# Altium PCB PCB1.PcbDoc
Units mil, origin at the board's own origin, x right, y up, seen from the top; angles counter-clockwise.
Board outline 6000 x 4000 mil, 2 copper layers (Top Layer, Bottom Layer); 10 components, 18 nets, 46 pads, 2 vias.
Unrouted connection lines stored in the file: 6.
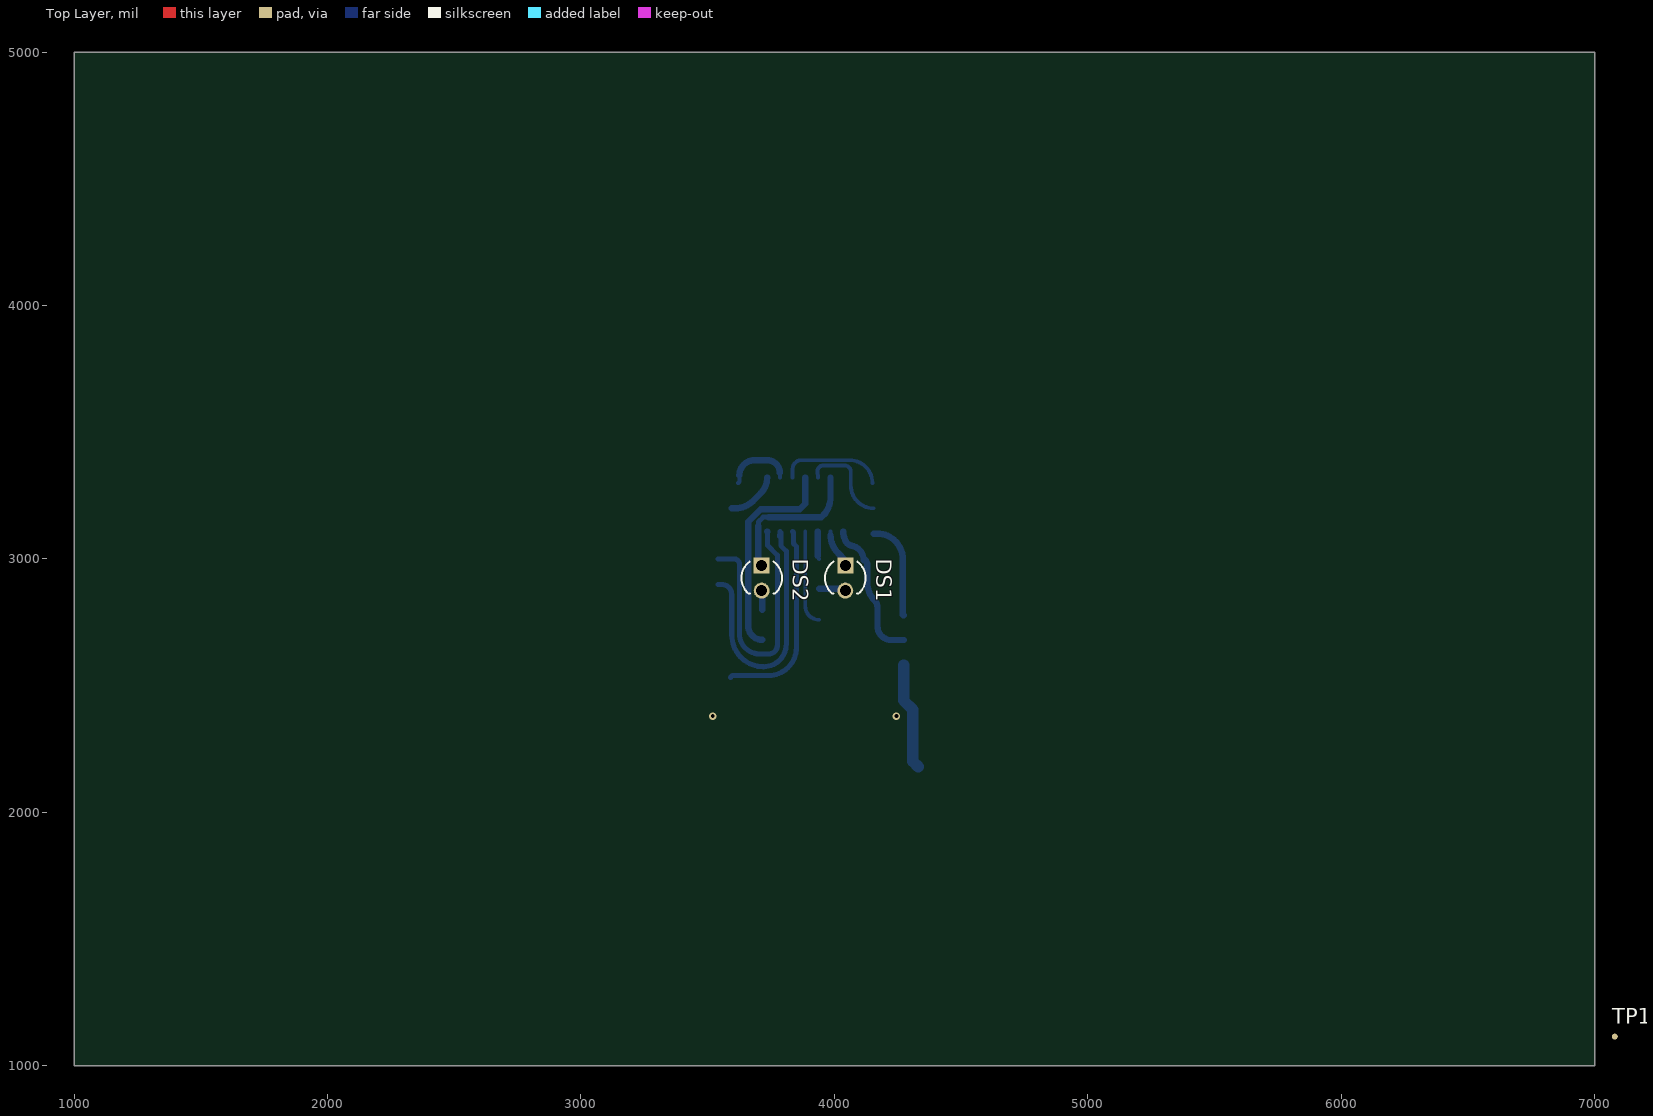
[diagram p0: Top Layer view]
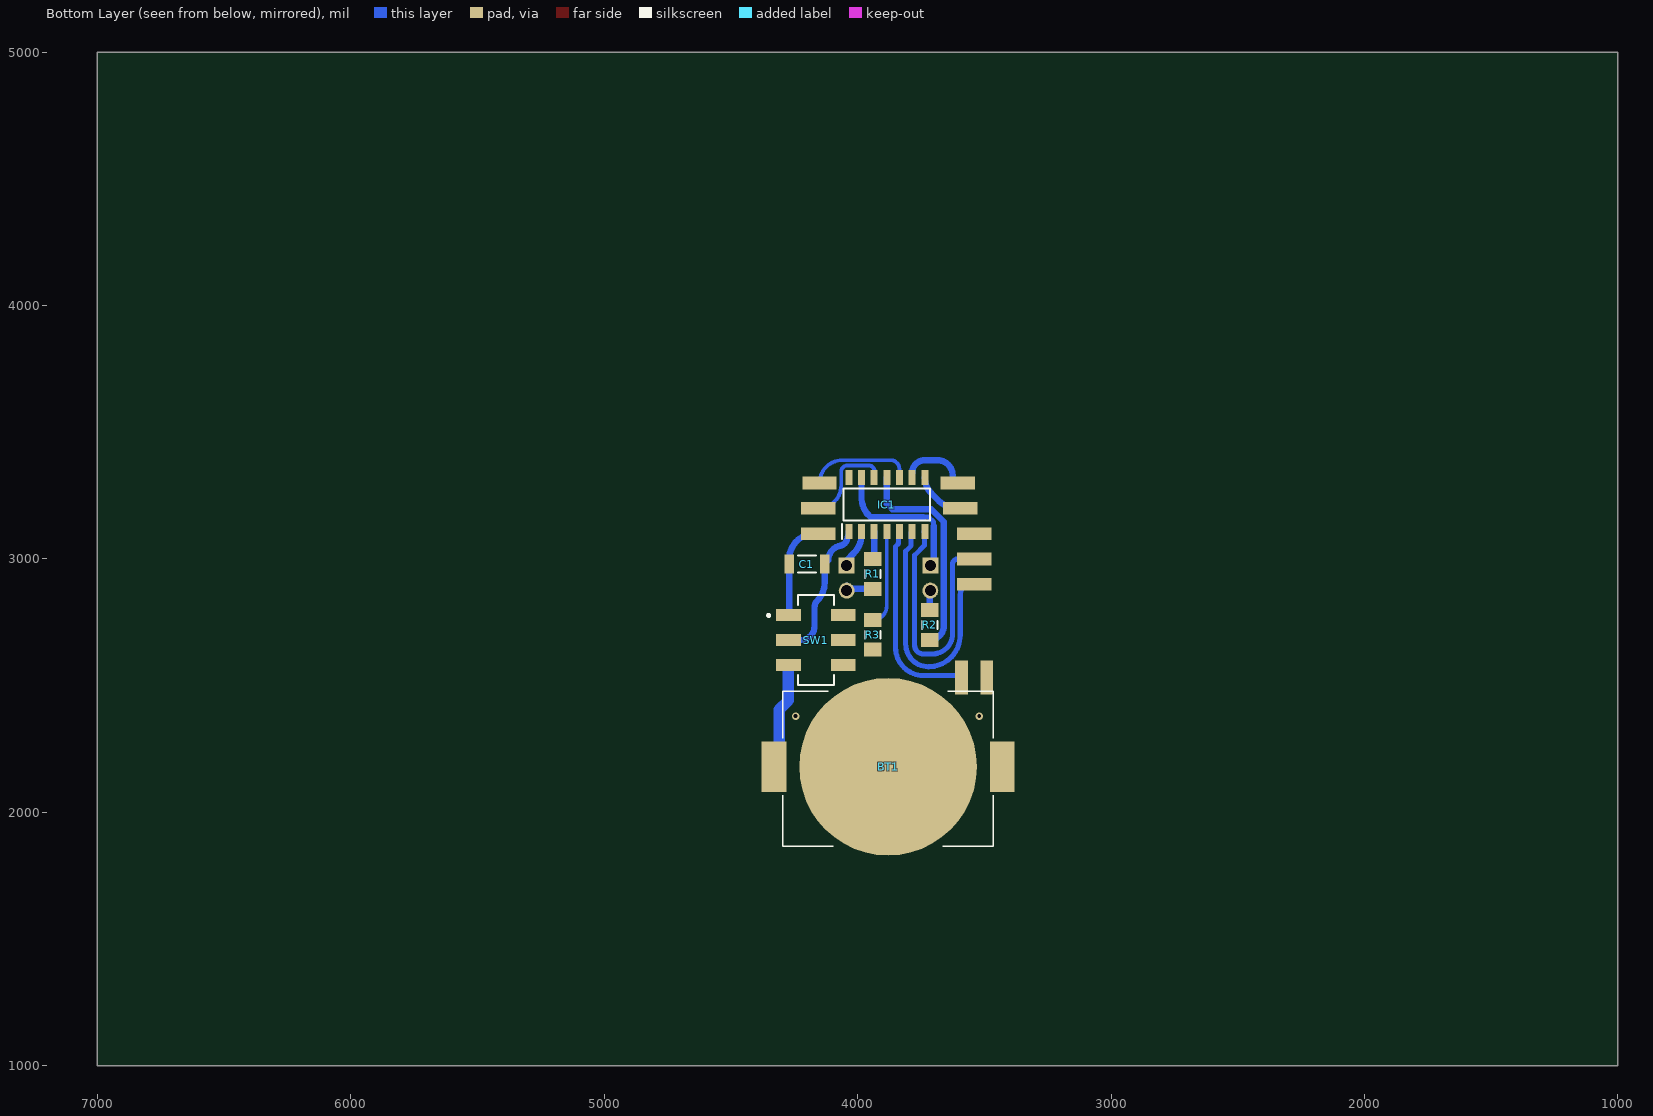
[diagram p1: Bottom Layer view, seen from below]
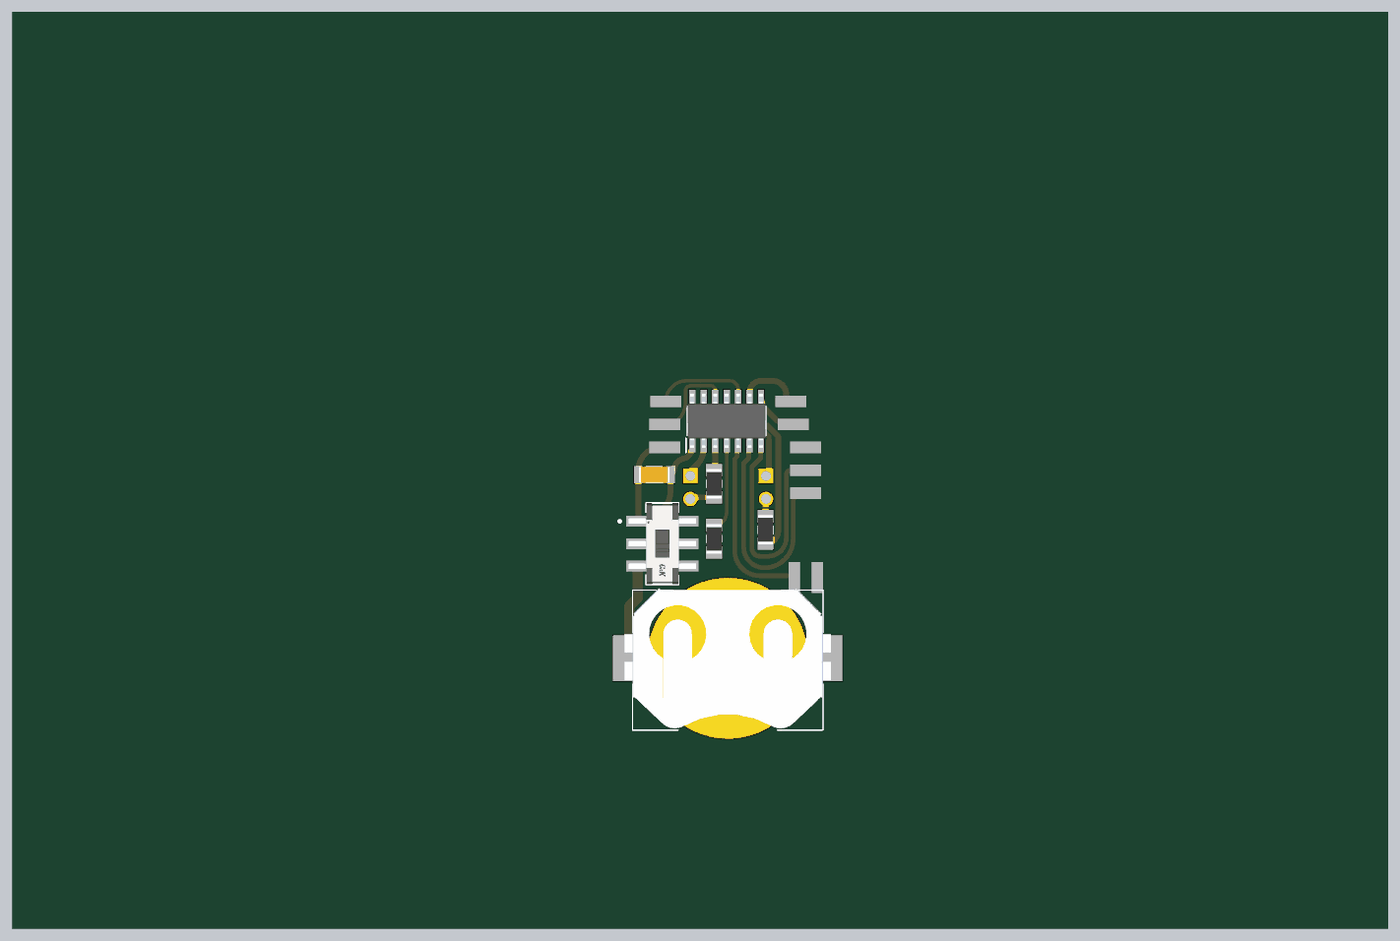
[diagram p2: 3D render of the assembled board from below, using the file's embedded part models]

## Layer stack, top to bottom
Top Solder: solder mask 0.4, Solder Resist, Dk 3.5
Top Layer: signal copper 1.4
Dielectric 1: dielectric 12.6, FR-4, Dk 4.8
Bottom Layer: signal copper 1.4
Bottom Solder: solder mask 0.4, Solder Resist, Dk 3.5

## Board outline
1000,1000 7000,1000 7000,5000 1000,5000

## Design rules (kind name [scope] priority, off if disabled: settings)
Clearance [All] p1: gap=10 ignorepadtopadclearanceinfootprint=FALSE except(0: Arc-Hole Track-Hole SMDPad-Hole THPad-Hole Via-Hole Fill-Hole Poly-Hole Region-Hole Text-Hole)
PolygonConnect [All] p1: connectstyle=Relief reliefconductorwidth=10 reliefentries=4 polygonreliefangle="90 Angle" airgapwidth=10
RoutingVias [All] p1: holewidth=28 width=50 viastyle="Through Hole" minholewidth=28 minwidth=50 maxholewidth=28 maxwidth=50
SolderMaskExpansion [All] p1: expansion=4 istentingtop=FALSE
Width [All] p1: maxlimit=10 minlimit=10 preferedwidth=10
30 further rules are at their usual default settings.

## Components (designator, comment, footprint, x,y, rotation, side; value= is the part's Value field where it differs from the comment)
BT1 "BAT-HLD-001" BAT_BAT-HLD-001 3880,2180 r180 bottom
C1 "Capacitor 1 uF +/- 10% 25 V 1206" CAPC3216X180X20ML20 4200,2980 r180 bottom value=1µF
DS1 "HLMP-1790" LED-2P-2.54-3MM_V 4043.15,2925 r270 top
DS2 "HLMP-1790" LED-2P-2.54-3MM_V 3713.15,2925 r270 top
IC1 "ATTINY404-SSN" SOIC127P600X175-14N 3885,3215 r90 bottom
R1 "Resistor 1k +/-1% 1206 250 mW" RESC3116X70X50ML13T20 3940,2940.94 r270 bottom value=0R-15R
R2 "Resistor 1k +/-1% 1206 250 mW" RESC3116X70X50ML13T20 3715,2740 r90 bottom value=0R-15R
R3 "Resistor 1k +/-1% 1206 250 mW" RESC3116X70X50ML13T20 3940,2700.94 r270 bottom value=30-70R
SW1 "JS202011SCQN" FP-JS202011SCQN-MFG 4165,2680 r270 bottom
TP1 "TPAD6R" TP06R 7080,1115 r90 top

## Footprints (in the part's own frame and the unit in brackets; to place one, negate y for a bottom-side part, rotate by r counter-clockwise, add the part's x,y. Pads: shape width x height; smd on the part's side, far side on the other; paste and mask are expansions set on the pad)
BAT_BAT-HLD-001 [mm]
  round 17.8 smd paste-10: N1(0,0)
  rect 2.5x5.1 smd: P1(-11.45,0) P2(11.45,0)
  silkscreen extent -10.55,-7.95 10.55,7.55, body extent -11.43,-7.75 11.43,7.75, height 4.32
CAPC3216X180X20ML20 [mm] "Chip Capacitor, 2-Leads, Body 3.40x1.80mm, IPC Low Density"
  rect 0.95x1.9 smd: 1(-1.775,0) 2(1.775,0)
  silkscreen extent -0.9,-0.85 0.9,0.85, body extent -1.7,-0.9 1.7,0.9, height 1.8
FP-JS202011SCQN-MFG [mm]
  rect 1.2x2.5 smd paste+0 mask+0: 1(-2.5,-2.75) 2(0,-2.75) 3(2.5,-2.75) 4(-2.5,2.75) 5(0,2.75) 6(2.5,2.75)
  silkscreen extent -4.5,-4.85 4.5,1.8, body extent -4.5,-3.75 4.5,3.75, height 5.5
LED-2P-2.54-3MM_V [mm] "LED, 2-Leads, Dia 3mm, Pitch 2.54mm"
  rect 1.6x1.6 hole 1.1: 1(-1.27,0)
  round 1.6 hole 1.1: 2(1.27,0)
  silkscreen extent -1.64,-2.03 1.57,2.03, body extent -2.06,-2.07 1.6,2.07, height 6.35
RESC3116X70X50ML13T20 [mm] "Chip Resistor, 2-Leads, Body 3.25x1.65mm, IPC Low Density"
  rect 1.4x1.75 smd: 1(-1.5,0) 2(1.5,0)
  silkscreen extent -0.4,-0.77 0.4,0.77, body extent -1.63,-0.82 1.63,0.82, height 0.7
SOIC127P600X175-14N [mm]
  rect 1.525x0.7 smd: 1(-2.712,3.81) 2(-2.712,2.54) 3(-2.712,1.27) 4(-2.712,0) 5(-2.712,-1.27) 6(-2.712,-2.54) 7(-2.712,-3.81) 8(2.712,-3.81) 9(2.712,-2.54) 10(2.712,-1.27) 11(2.712,0) 12(2.712,1.27) 13(2.712,2.54) 14(2.712,3.81)
  silkscreen extent -3.47,-4.33 1.6,4.51, body extent -3,-4.33 3,4.33, height 1.75
TP06R [mm] "Testpoint, round, d=0.6mm"
  round 0.6 smd paste-1: 1(0,0)

## Part data
BT1: "Battery Retainer Coin, 20.0mm 1 Cell SMD (SMT) Tab", Package=None, Availability=Unavailable, MF="{'manufacturer': u'Linx'}", MP=BAT-HLD-001, Price=None
C1: library part CMP-001-00006-5, "Chip Capacitor, 1 uF, +/- 10%, 25 V, 1206 (3216 Metric)", Capacitor Type=Ceramic, Case/Package=1206, Max Operating Temperature=125°C, Min Operating Temperature=-55°C, Tolerance=10%, Voltage Rating=25V, Mounting Technology=SM, Pins=2, RoHS Compliant=True
DS1 DS2: library part CMP-2000-05186-1, "LED, Green, 2 mA, 1.9 V, -20 to 100 degC, 2-Pin THD, RoHS, Bulk", Color=Green, Dominant Wavelength/Color Temperature=569nm, Manufacturer=Avago, Package=2T-1, Category=LEDs, Datasheet URL=https://datasheet.ciiva.com/11773/0900766b800204ad-11773539.pdf, Datasheet Version=Jul-14, Intensity=2.3mcd, Lens Appearance=ColoredDiffused, Lens Shape Type=Circular, Manufacturer URL=http://www.avagotech.com/, Mounting=ThroughHole, Mounting Orientation=TopMount, Number of LEDs=1, Packaging=Bulk, Peak Wavelength=565nm, Pin Count=2, Rad Hard=No, Type=Uni-Color, Viewing Angle=50deg
IC1: "Integrated Circuit", Manufacturer_Name=Microchip, Mouser Part Number=579-ATTINY404-SSN, Arrow Part Number=ATTINY404-SSN, Arrow Price/Stock=https://www.arrow.com/en/products/attiny404-ssn/microchip-technology?region=nac, Datasheet Link=https://componentsearchengine.com/Datasheets/2/ATTINY404-SSN.pdf, Height=1.75mm, Manufacturer_Part_Number=ATTINY404-SSN, Mouser Price/Stock=https://www.mouser.co.uk/ProductDetail/Microchip-Technology/ATTINY404-SSN?qs=3HJ2avRr9PJ8OrTjUlXZkg%3D%3D
R1 R2 R3: library part CMP-009-00011-4, "Chip Resistor, 1 KOhm, +/- 1%, 0.25 W, -55 to 155 degC, 1206 (3216 Metric)", Case/Package=1206, Max Operating Temperature=155°C, Min Operating Temperature=-55°C, Power=250mW, Tolerance=1%, Voltage Rating=200V, Mounting Technology=SM, Pins=2, RoHS Compliant=True
SW1: library part CMP-2000-05087-3, "SWITCH SLIDE DPDT 300MA 6V", Actuator Color=Black, Contact Current Rating=300mA, Contact Resistance=70mR, Flammability Rating="UL94 V-2", Max Operating Temperature=85°C, Max Voltage Rating (DC)=6V, Min Operating Temperature=-20°C, Package Quantity=1, Actuator Length=2mm, Actuator Material=Nylon, Actuator Type=Standard, Contact Material="Copper Alloy", Contact Plating=Silver, Current Rating=300mA, Depth=7.5mm, Electrical Life=5000Cycles, Housing Material=Nylon, Lead Free="Lead Free", Length=9mm, Max Current Rating=300mA, Mount="Surface Mount", Orientation=Vertical, Packaging="Tape and Reel", Radiation Hardening=No, REACH SVHC="No SVHC", Series=JS, Switch Function=On-On, Switch Travel=2mm, Termination="Gull Wing", Throw Configuration=DPDT, Voltage Rating (DC)=6V
TP1: library part CMP-00028-00002-1, "Touchpad", Pins=1

## Free pads (board coordinates)
  rect 135.04x50 smd far side paste+0 mask+0: 2(3595,3200) 2(3605,3300) 2(4150,3300) 2(4155,3100) 2(4155,3200) 3(3540,2900) 3(3540,3100) RX(3540,3000)
  rect 50x135.04 smd far side paste+0 mask+0: 3(3490,2532.5) RX(3590,2532.5)

## Via types
v1: diameter 30, hole 15, Top Layer to Bottom Layer, 2 vias

## Nets (pads, with @x,y where several pads share a name; then routed paths per layer and width w, separated by ;. In a path a pad name is that pad's centre, name@x,y a point inside that pad or via, vN(x,y) a via of type N, cw(c..) or ccw(c..) an arc to the next point about the centre after c; other vN are vias at no path point)
AIN4/PWM4: DS1.1 IC1.2 | length 133
  Bottom Layer w15: IC1.2@3985,3094.57 IC1.2
  Bottom Layer w25: IC1.2@3985,3094.57 ccw(c4085,3094.57) 4014.29,3023.86 DS1.1@4043.15,2995
AIN5/PWM5: IC1.3 R1.1 | length 109.6
  Bottom Layer w15: R1.1@3935,3012.07 ccw(c3952.07,3012.07) R1.1
  Bottom Layer w25: R1.1@3935,3012.07 IC1.3
AIN6: IC1.4 R3.1 | length 379.6
  Bottom Layer w15: IC1.4 3885,2815 ccw(c3940,2815) R3.1
AIN7: IC1.5 | length 790.3
  Bottom Layer w20: 3590,2532.5 3597.5,2540 3740,2540 ccw(c3740,2650) 3850,2650 3850,3050 3838.78,3061.22 3838.78,3104.45 IC1.5
EXTCLK/SCK: DS2.1 IC1.13 | length 600.5
  Bottom Layer w20: 3700,3130 3700,3146.01 3718.99,3165 3740,3165
  Bottom Layer w25: 3700,3130 3700,2988.15 DS2.1 ; 3740,3165 3948.52,3165 3964.81,3181.29 ccw(c3869.85,3246.42) 3985,3246.42 IC1.13
GND: BT1.N1 C1.1 IC1.14 SW1.1 SW1.4 | length 395.5
  Bottom Layer w25: 4155,3100 4169.88,3100 cw(c4169.88,3000) 4269.88,3000 C1.1 4269.88,2781.81 ccw(c4273.27,2781.81) SW1.1
MISO: IC1.12 | length 379.2
  Bottom Layer w15: IC1.12 3933.25,3344.29 3933.25,3346.85 cw(c3957.01,3345.47) 3953.44,3369 4041,3369 cw(c4041,3345) 4065,3345 4065,3290 ccw(c4155,3290) 4155,3200
MOSI: IC1.11 R2.1 | length 855.2
  Bottom Layer w25: R2.1 cw(c3715,2735.94) 3660,2735.94 3660,3146.32 3709.68,3196 3863.03,3196 3885,3217.97 IC1.11
NetBT1_P1: BT1.P1 BT1.P2 SW1.3 SW1.6 | length 425.4
  Bottom Layer w45: SW1.3 4273.27,2441.73 4310,2405 4310,2200.79 BT1.P1
NetDS1_2: DS1.2 R1.2 | length 106.7
  Bottom Layer w25: R1.2 4011.5,2881.89 ccw(c4011.5,2926.65) DS1.2@4043.15,2895
NetDS2_2: DS2.2 R2.2 | length 77.8
  Bottom Layer w25: DS2.2 3715,2875 R2.2
NetR3_2: R3.2 TP1.1
RESET: IC1.10 | length 419.6
  Bottom Layer w15: IC1.10 3835,3355 cw(c3870,3355) 3870,3390 4060,3390 cw(c4060,3300) 4150,3300
RxD: IC1.6 | length 1050.5
  Bottom Layer w20: 3540,2900 3555,2900 cw(c3555,2860) 3595,2860 3595,2700 ccw(c3720.43,2700) 3720.43,2574.57 ccw(c3720.43,2664.6) 3810.45,2664.6 3810.45,3030.88 3788.78,3052.55 3788.78,3104.45 IC1.6 IC1.6@3784.23,3088.21
SCL: IC1.8 | length 224.2
  Bottom Layer w15: IC1.8@3735,3301.42 IC1.8
  Bottom Layer w25: 3595,3200 3608.58,3200 ccw(c3608.58,3300) 3665,3217.44 ccw(c3608.58,3300) 3679.29,3229.29 3709,3259 ccw(c3646.23,3321.77) IC1.8
SDA: IC1.9 | length 273.9
  Bottom Layer w15: 3620,3300 ccw(c3620,3305) 3625,3305 3625,3330 ; IC1.9 IC1.9@3785,3340
  Bottom Layer w25: 3625,3330 cw(c3685,3330) 3685,3390 3735,3390 cw(c3735,3340) IC1.9@3785,3340
TxD/PWM2: IC1.7 | length 1051.8
  Bottom Layer w20: 3540,3000 3605,3000 cw(c3605,2980) 3625,2980 3625,2705 ccw(c3704.93,2705) 3702.71,2625.1 3740.1,2625.1 ccw(c3740.1,2660) 3775,2660 3775,3015 3736.28,3053.72 IC1.7@3736.28,3106.95
  Bottom Layer w25: IC1.7 IC1.7@3736.28,3106.95
VCC: C1.2 IC1.1 SW1.2 | length 566.1
  Bottom Layer w25: IC1.1 ccw(c4112.3,3108.23) 4050.74,3061.48 ccw(c4075.88,3089.31) 4068.62,3052.52 cw(c4057.64,2995.87) 4115.34,2995.88 4115.34,2994.78 4123.92,2994.78 C1.2 4130.12,2906.3 ccw(c4230.12,2906.3) 4159.41,2835.59 cw(c4133.83,2810.02) 4170,2810.02 4170,2735 ccw(c4225,2735) 4225,2680 SW1.2
pads on no net: SW1.5
copper on no net:
  other v1: 3520,2380 4245,2380